# Altium PCB Receive_V1_Pcb.PcbDoc
Units mm, origin at the board's own origin, x right, y up, seen from the top; angles counter-clockwise.
Board outline 46.55 x 46.66 mm, 2 copper layers (Top Layer, Bottom Layer); 37 components, 26 nets, 103 pads, 22 vias.
Unrouted connection lines stored in the file: 1.
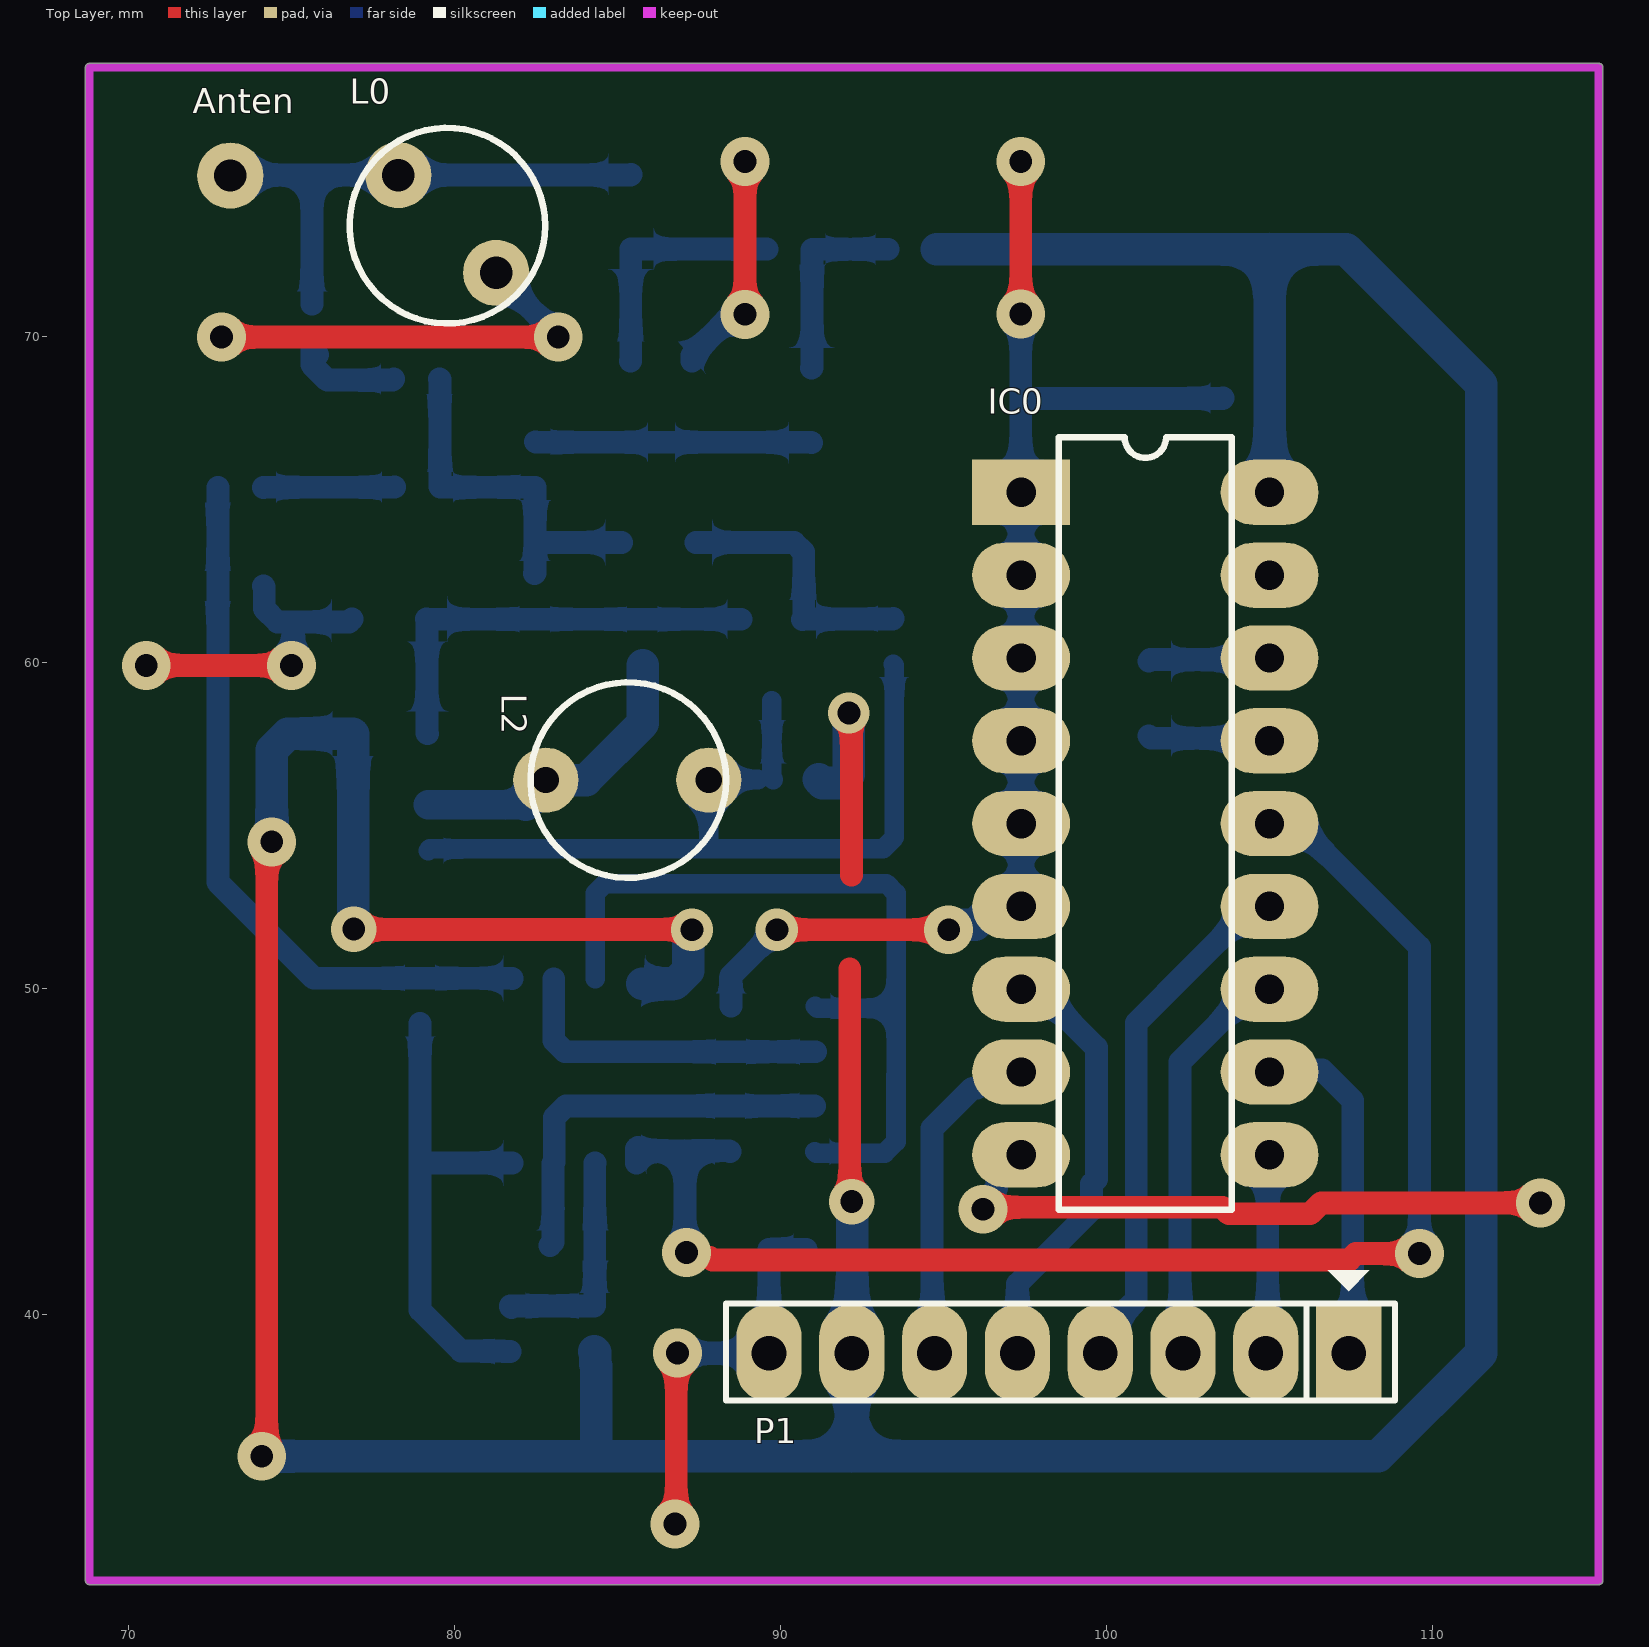
[diagram p0: Top Layer view]
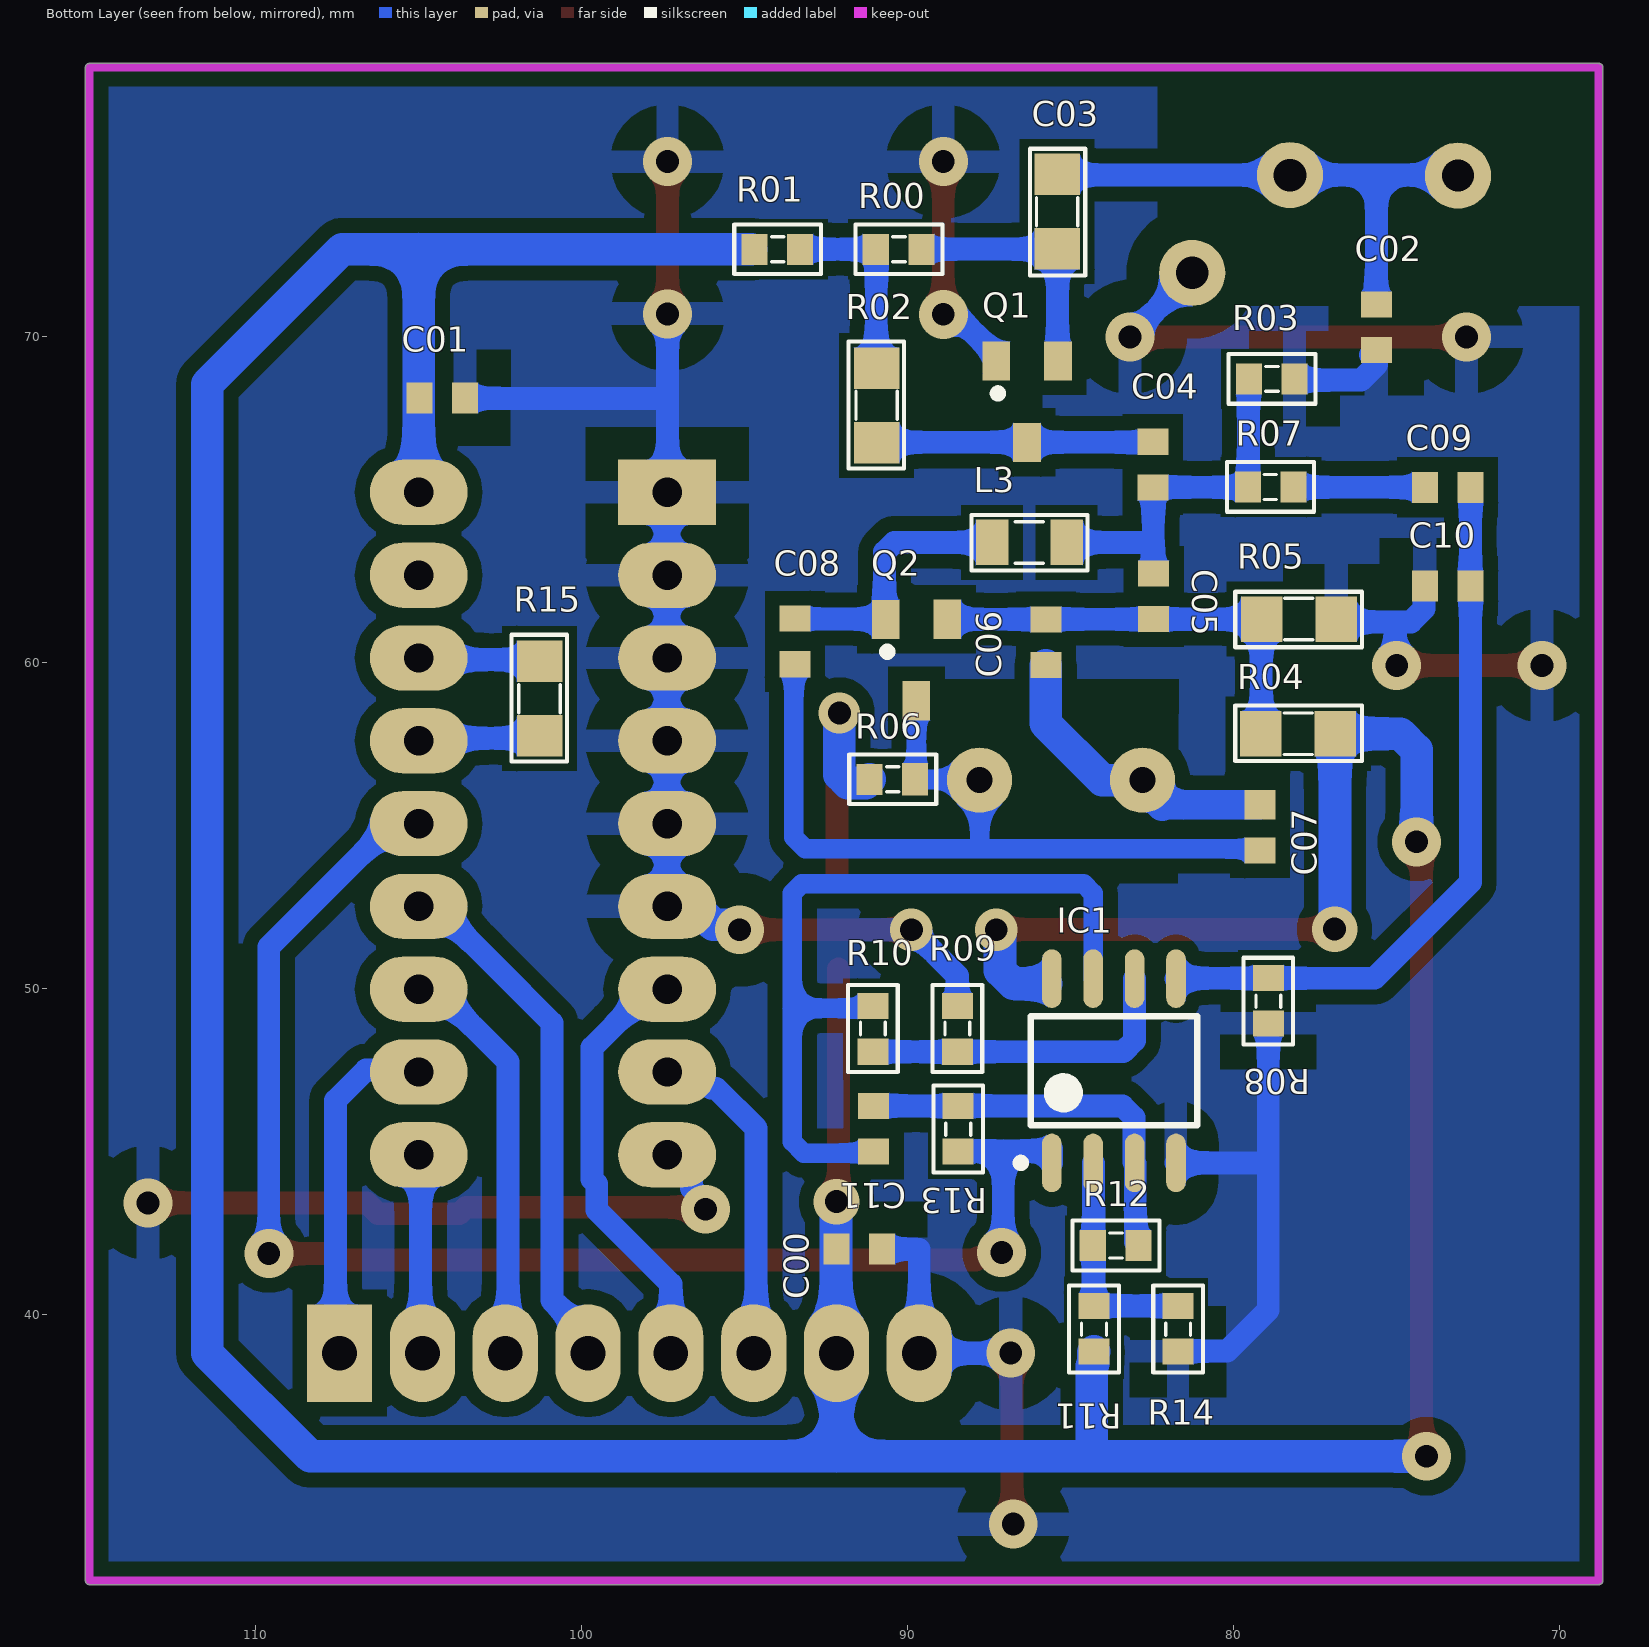
[diagram p1: Bottom Layer view, seen from below]
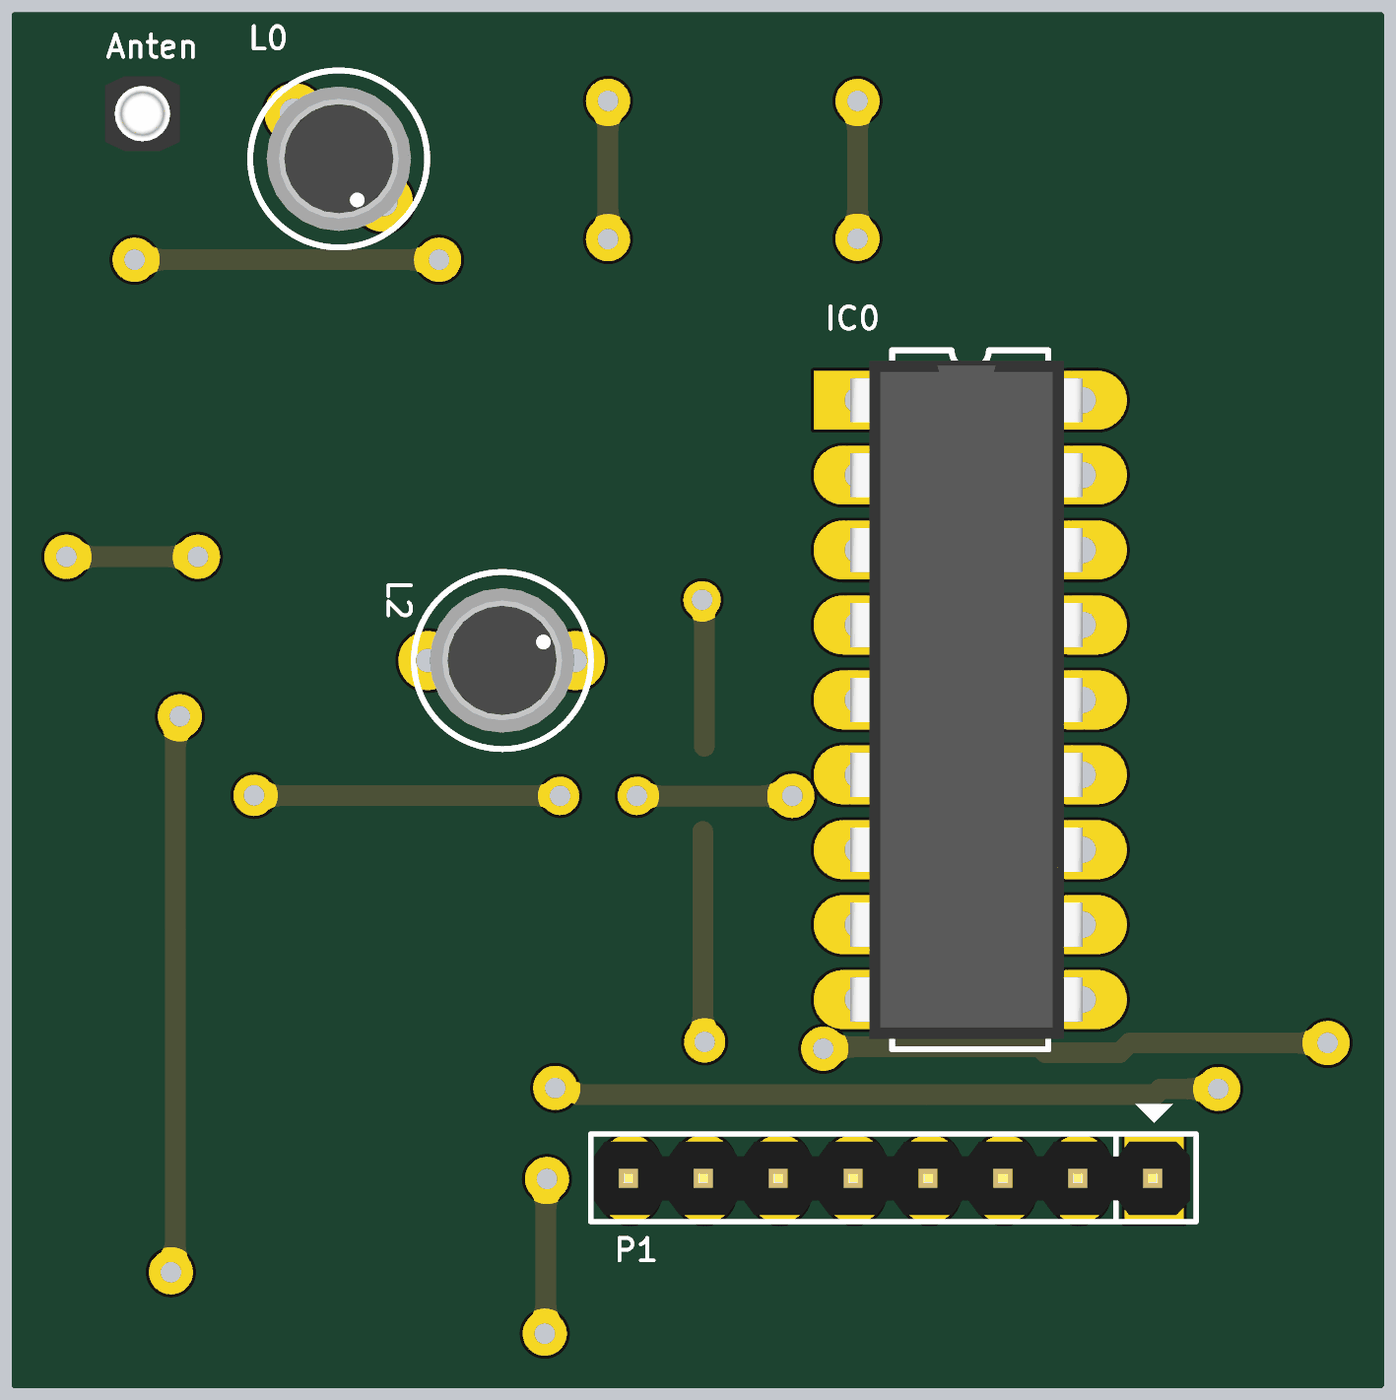
[diagram p2: 3D render of the assembled board from above, using the file's embedded part models]
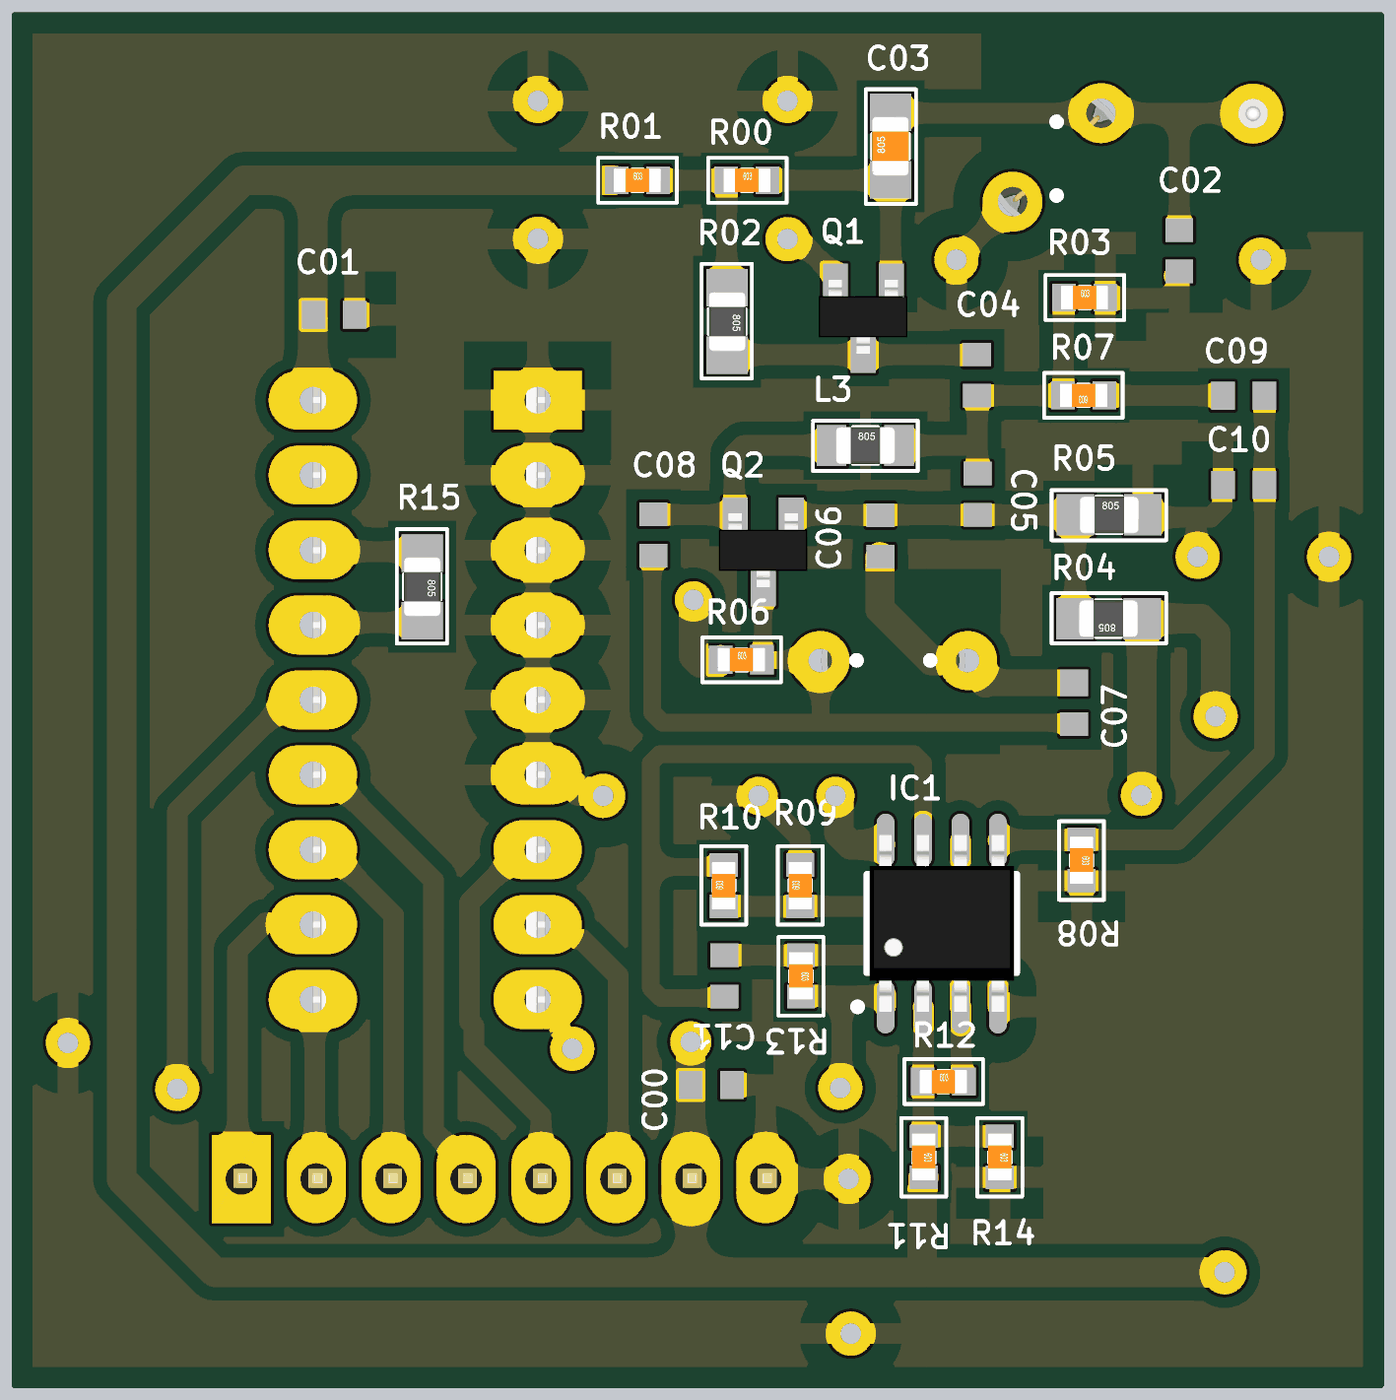
[diagram p3: 3D render of the assembled board from below, using the file's embedded part models]

## Layer stack, top to bottom
Top Solder: solder mask 0.0102, Solder Resist, Dk 3.5
Top Layer: signal copper 0.0356
Dielectric 1: dielectric 0.32, FR-4, Dk 4.8
Bottom Layer: signal copper 0.0356
Bottom Solder: solder mask 0.0102, Solder Resist, Dk 3.5

## Board outline
68.669,31.852 68.669,78.257 cw(c68.796,78.257) 68.796,78.385 112.573,78.385 115.087,78.385 cw(c115.087,78.257) 115.215,78.257 115.215,31.852 cw(c115.087,31.852) 115.087,31.724 68.796,31.724 cw(c68.796,31.852)

## Design rules (kind name [scope] priority, off if disabled: settings)
Clearance [All] p1: gap=0.457 ignorepadtopadclearanceinfootprint=FALSE
PolygonConnect [All] p1: connectstyle=Relief reliefconductorwidth=0.7 reliefentries=4 polygonreliefangle="90 Angle" airgapwidth=1
RoutingVias [All] p1: holewidth=0.711 width=1.27 viastyle="Through Hole" minholewidth=0.1 minwidth=0.1 maxholewidth=0.711 maxwidth=3
SolderMaskExpansion [All] p1: expansion=0.102 istentingtop=FALSE
Width [All] p1: maxlimit=5 minlimit=0.254 preferedwidth=0.7 minimp=50.000000 maximp=50.000000 favimp=50.000000
30 further rules are at their usual default settings.

## Components (designator, comment, footprint, x,y, rotation, side; value= is the part's Value field where it differs from the comment)
Anten "Test Point" TP 73.114,74.943 r90 top
C00 "Cap Non-Pol SMD" CAP-SM-0603#1 91.478,42.012 r0 bottom value=0.1uF
C01 "Cap Non-Pol SMD" CAP-SM-0603#1 104.267,68.123 r0 bottom value=0.1uF
C02 "Cap Non-Pol SMD" CAP-SM-0603#1 75.616,70.294 r90 bottom value=2p
C03 "Cap Non-Pol SMD" CAP-SM-0805 85.407,72.695 r90 bottom value=7p
C04 "Cap Non-Pol SMD" CAP-SM-0603#1 82.474,66.078 r90 bottom value=2p
C05 "Cap Non-Pol SMD" CAP-SM-0603#1 82.448,62.039 r90 bottom value=15p
C06 "Cap Non-Pol SMD" CAP-SM-0603#1 85.75,60.63 r90 bottom value=33pF
C07 "Cap Non-Pol SMD" CAP-SM-0603#2 79.184,54.94 r90 bottom value=4pF/X
C08 "Cap Non-Pol SMD" CAP-SM-0603#1 93.447,60.655 r90 bottom value=2p
C09 "Cap Non-Pol SMD" CAP-SM-0603#1 73.431,65.38 r0 bottom value=1uF
C10 "Cap Non-Pol SMD" CAP-SM-0603#1 73.431,62.357 r0 bottom value=1uF
C11 "Cap Non-Pol SMD" CAP-SM-0603#1 91.034,45.707 r270 bottom value=100nF
IC0 "PT2272" DIP18 101.181,55.067 r270 top
IC1 "LM358" "SOp 8" 83.668,47.485 r90 bottom
L0 "2.5T" L-DIP-M-5.3#1 79.769,73.406 r270 top value="150 mH"
L2 "4.5T" L-DIP-M-5.3#2 85.319,56.401 r0 top value="150 mH"
L3 "1uH" RES-SMD-0805 86.258,63.691 r180 bottom value="150 mH"
P1 "Header 8" JP8 107.417,38.824 r180 top
Q1 "C1815" SOT23B 86.335,68.008 r0 bottom
Q2 "C1815" SOT23B 89.725,60.084 r0 bottom
R00 "RESISTOR SMD" RES-SM-0603#1 90.959,72.682 r180 bottom value=47K/39K
R01 "RESISTOR SMD" RES-SM-0603#1 94.678,72.682 r180 bottom value=180K/680R
R02 "RESISTOR SMD" RES-SM-0805 90.945,69.037 r270 bottom value=5.1K/680R
R03 "RESISTOR SMD" RES-SM-0603#1 79.515,68.707 r180 bottom value=47K/6.2K
R04 "RESISTOR SMD" RES-SM-0805 76.873,57.823 r0 bottom value=6.2K/150K
R05 "RESISTOR SMD" RES-SM-0805 79.134,61.341 r180 bottom value=3.9K/56K
R06 "RESISTOR SMD" RES-SM-0603#2 91.149,56.426 r180 bottom value=56K/27K
R07 "RESISTOR SMD" RES-SM-0603#1 78.168,65.392 r0 bottom value=27K/6.2K
R08 "RESISTOR SMD" RES-SM-0603#1 78.93,50.319 r270 bottom value=10K/150K
R09 "RESISTOR SMD" RES-SM-0603#1 88.468,48.082 r90 bottom value=10K/680R
R10 "RESISTOR SMD" RES-SM-0603#1 91.059,48.082 r90 bottom value=2.2M/150K
R11 "RESISTOR SMD" RES-SM-0603#1 84.277,40.259 r270 bottom value=22/K10K
R12 "RESISTOR SMD" RES-SM-0603#1 84.303,42.126 r180 bottom value=18K/150K
R13 "RESISTOR SMD" RES-SM-0603#1 88.443,46.395 r270 bottom value=2.2M/3.3M
R14 "RESISTOR SMD" RES-SM-0603#1 81.699,40.259 r270 bottom
R15 "RESISTOR SMD" RES-SM-0805 101.282,60.046 r270 bottom value=680K

## Footprints (in the part's own frame and the unit in brackets; to place one, negate y for a bottom-side part, rotate by r counter-clockwise, add the part's x,y. Pads: shape width x height; smd on the part's side, far side on the other; paste and mask are expansions set on the pad)
CAP-SM-0603#1 [mm] "SMD Ceramic Capacitor Size 0603"
  rect 0.8x0.95 smd: 1(-0.7,0) 2(0.7,0)
  body extent -0.85,-0.45 0.85,0.45, height 0.6
CAP-SM-0603#2 [mm] "SMD Ceramic Capacitor Size 0603"
  rect 0.8x0.95 smd: 1(-0.7,0)
  rect 0.9x0.95 smd: 2(0.7,0)
  body extent -0.85,-0.45 0.85,0.45, height 0.6
CAP-SM-0805 [mil]
  rect 50x55 smd: 1(0,0) 2(90,0)
  silkscreen extent -32,-34 121,33, body extent 6,-25 84,25, height 31
DIP18 [mm] "DIP; 18 Leads; Row Spacing 7.62 mm; Pitch 2.54 mm"
  rect 2x3 hole 0.9: 1(-10.16,-3.81)
  oval 2x3 hole 0.9: 2(-7.62,-3.81) 3(-5.08,-3.81) 4(-2.54,-3.81) 5(0,-3.81) 6(2.54,-3.81) 7(5.08,-3.81) 8(7.62,-3.81) 9(10.16,-3.81) 10(10.16,3.81) 11(7.62,3.81) 12(5.08,3.81) 13(2.54,3.81) 14(0,3.81) 15(-2.54,3.81) 16(-5.08,3.81) 17(-7.62,3.81) 18(-10.16,3.81)
  silkscreen extent -11.85,-2.65 11.85,2.65, body extent -11.49,-4.06 11.5,3.81, height 5.08
JP8 [mm] "JP8"
  rect 2x3 hole 1.067: 1(0,0)
  oval 2x3 hole 1.067: 2(2.54,0) 3(5.08,0) 4(7.62,0) 5(10.16,0) 6(12.7,0) 7(15.24,0) 8(17.78,0)
  silkscreen extent -1.42,-2.54 19.1,1.45, body extent -1.22,-1.27 19,1.23, height 8.22
L-DIP-M-5.3#1 [mil] "THT Inductor, 2-Leads, Body 5.3  mm"
  round 80 hole 39.37: 1(-61.11,-59.12) 2(57,59)
  silkscreen extent -118,-118 118,118, body extent -96,-96 96,96, height 299
L-DIP-M-5.3#2 [mil] "THT Inductor, 2-Leads, Body 5.3  mm"
  round 78.74 hole 31.5: 1(-99.57,0) 2(97.28,0)
  silkscreen extent -118,-118 118,118, body extent -96,-96 96,96, height 299
RES-SM-0603#1 [mm]
  rect 0.8x0.95 smd: 1(-0.014,0) 2(1.386,0)
  silkscreen extent -0.64,-0.76 2.03,0.76, body extent -0.11,-0.4 1.49,0.4, height 0.3
RES-SM-0603#2 [mm]
  rect 0.8x0.95 smd: 1(-0.014,0)
  rect 0.8x1 smd: 2(1.386,0)
  silkscreen extent -0.64,-0.76 2.03,0.76, body extent -0.11,-0.4 1.49,0.4, height 0.3
RES-SM-0805 [mil]
  rect 50x55 smd: 1(0,0) 2(90,0)
  silkscreen extent -32,-34 121,33, body extent 6,-25 84,25, height 31
RES-SMD-0805 [mil]
  rect 39.37x55 smd: 1(-45,0) 2(45,0)
  silkscreen extent -70,-34 70,33, body extent -39,-25 39,25, height 31
"SOp 8" [mm] "SOIC, 8-Leads, Body 4.9x3.9mm, Pitch 1.27mm, IPC High Density"
  oval 1.8x0.6 smd: 1(-2.825,1.905) 2(-2.825,0.635) 3(-2.825,-0.635) 4(-2.825,-1.905) 5(2.825,-1.905) 6(2.825,-0.635) 7(2.825,0.635) 8(2.825,1.905)
  silkscreen extent -2.95,-2.55 1.68,2.98, body extent -2.99,-2.45 3,2.45, height 1.6
SOT23B [mm] "SOT 23B"
  rect 0.85x1.2 smd: 1(0.94,-1.245) 2(0,1.25) 3(-0.95,-1.25)
  silkscreen extent 0.77,-0.38 1.02,-0.13, body extent -1.5,-1.3 1.5,1.2, height 1.06
TP [mil] "Connect 1"
  round 80 hole 39: TP1(0,0)
  body extent -50,-50 50,50, height 179

## Part data
C00 C01 C02 C03 C04 C05 C06 C07 C08 C09 C10 C11: "Capacitor"
IC0: "Remote Control Decoder"
IC1: "Low-Power Dual Operational Amplifier"
L0 L2 L3: library part L-DIP-1, "Inductor"
P1: "Header, 8-Pin", LatestRevisionDate=17-Jul-2002, LatestRevisionNote="Re-released for DXP Platform.", Publisher="Altium Limited"
Q1 Q2: "NPN Bipolar Transistor"
R00 R01 R02 R03 R04 R05 R06 R07 R08 R09 R10 R11 R12 R13 R14 R15: "Resistor"
  R14: R?=22K/10K

## Via types
v1: diameter 1.5, hole 0.7, Top Layer to Bottom Layer, 17 vias
v2: diameter 1.3, hole 0.7, Top Layer to Bottom Layer, 2 vias
v3: diameter 1.4, hole 0.7, Top Layer to Bottom Layer, 2 vias
v4: diameter 1.27, hole 0.7, Top Layer to Bottom Layer, 1 vias

## Nets (pads, with @x,y where several pads share a name; then routed paths per layer and width w, separated by ;. In a path a pad name is that pad's centre, name@x,y a point inside that pad or via, vN(x,y) a via of type N, cw(c..) or ccw(c..) an arc to the next point about the centre after c; other vN are vias at no path point)
D0: IC0.13 P1.4 | length 16.2
  Bottom Layer w0.7: P1.4 99.797,39.34 100.901,40.445 100.901,48.954 102.684,50.736 104.475,52.527 IC0.13
D1: IC0.12 P1.3 | length 12.6
  Bottom Layer w0.7: P1.3 102.248,38.913 102.248,47.76 104.475,49.987 IC0.12
D2: IC0.11 P1.1 | length 10.8
  Bottom Layer w0.7: IC0.11 105.05,47.507 106.608,47.507 107.544,46.571 107.544,38.951 P1.1
D3: IC0.10 P1.2 | length 6.1
  Bottom Layer w0.7: P1.2 104.934,38.881 104.934,44.85 IC0.10
D4: IC0.8 P1.6 | length 10.4
  Bottom Layer w0.7: P1.6 94.64,38.9 94.64,45.72 95.87,46.949 96.021,46.949 96.519,47.447 IC0.8
D5: IC0.7 P1.5 | length 13.4
  Bottom Layer w0.7: P1.5 97.257,40.945 99.53,43.218 99.53,44.01 99.678,44.159 99.678,48.196 97.887,49.987 IC0.7
Data: IC0.14 IC1.1 R13.2 | length 44.7
  Top Layer w0.7: v1(87.109,41.91) 87.262,41.757 87.828,41.757 87.904,41.681 107.438,41.681 107.634,41.877 v1(109.588,41.877)
  Bottom Layer w0.7: IC1.1 IC1.1@85.573,45.034 ; IC1.1@85.615,45.136 85.573,45.093 IC1.1@85.573,45.034 ; v1(87.109,41.91) 87.058,41.961 87.058,45.034 ; R13.2 88.417,45.034 87.058,45.034 ; IC0.14 105.804,55.067 109.588,51.283 v1(109.588,41.877) ; IC1.1@85.573,45.034 87.058,45.034
GND: C00.1 C01.1 C02.1 C10.2 IC0.1 IC0.2 IC0.3 IC0.4 IC0.5 IC0.6 IC0.9 IC1.4 L0.2 P1.8 Q1.1 R03.2 R05.2 R08.2 R09.2 R14.2 | length 119.8
  Top Layer w0.7: v1(70.536,59.919) v1(74.993,59.919) v1@74.777,59.919 ; v1(72.847,69.99) v1(83.172,69.99) ; v1(86.754,33.579) 86.792,33.617 86.792,38.786 v1(86.83,38.824) ; v1(88.9,70.688) v1(88.9,75.374) ; v2(89.878,51.812) v1(95.148,51.812) ; v1(96.198,43.239) 96.258,43.299 103.543,43.299 103.742,43.1 106.239,43.1 106.573,43.434 v1(113.297,43.434) ; v1(97.358,70.701) v1(97.358,75.374)
  Bottom Layer w0.7: C10.2 74.155,62.333 74.155,61.655 74.558,61.252 75.044,61.252 ; v1(74.993,59.919) 75.044,59.969 75.044,61.252 ; C02.1@75.794,69.448 75.648,69.594 C02.1 75.616,69.144 76.091,68.669 78.091,68.669 R03.2 ; R05.2 76.759,61.252 75.044,61.252 ; R08.2 78.93,44.539 ; L0.2 81.267,71.926 83.172,70.021 v1(83.172,69.99) ; R14.2 81.492,38.873 81.478,38.887 80.188,38.887 78.93,40.145 78.93,44.539 ; IC1.4 79.052,44.66 78.93,44.539 ; v1(86.83,38.824) P1.8 89.637,42.012 C00.1 ; Q1.1 87.274,69.428 88.389,70.542 88.754,70.542 v1(88.9,70.688) ; R09.2 88.468,50.402 v2(89.878,51.812) ; v1(95.148,51.812) v1@95.301,51.965 ; v1(96.198,43.239) 96.198,43.455 96.622,43.88 96.622,44.307 97.223,44.907 IC0.9 ; IC0.6@96.519,52.527 IC0.6 IC0.5 IC0.4 IC0.3 IC0.2 IC0.1 97.358,65.24 v1(97.358,70.701) ; 97.447,68.11 103.554,68.11 C01.1
  Bottom Layer w1: v1@95.301,51.965 95.957,51.965 IC0.6@96.519,52.527
NetAnten_TP1: Anten.TP1 C02.2 C03.2 L0.1 | length 16.3
  Bottom Layer w0.7: Anten.TP1 73.133,74.962 75.616,74.962 ; C02.2 75.616,74.962 ; C03.2 85.388,74.962 75.616,74.962
NetC03_1: C03.1 Q1.3 R00.2 | length 7.6
  Bottom Layer w0.7: Q1.3 85.396,69.27 85.396,72.683 C03.1 85.414,72.688 89.567,72.688 R00.2
NetC04_2: C04.2 Q1.2 R02.2 | length 8.5
  Bottom Layer w0.7: C04.2 82.487,66.765 90.931,66.765 R02.2
NetC05_1: C05.1 C06.2 Q2.3 R04.2 R05.1 | length 13.2
  Bottom Layer w0.7: R05.1 R05.1@79.137,61.337 ; R04.2 79.146,57.836 79.146,61.328 R05.1@79.137,61.337 ; Q2.3 88.772,61.337 R05.1@79.137,61.337
NetC06_1: C06.1 C07.2 L2.1 | length 9.5
  Bottom Layer w0.7: L2.1@82.789,56.249 L2.1 ; C06.1 C06.1@85.763,59.917
  Bottom Layer w0.9: C07.2 L2.1@82.18,55.64
  Bottom Layer w1: L2.1@82.18,55.64 L2.1@82.789,56.249 ; L2.1 84.023,56.401 85.763,58.141 C06.1@85.763,59.917
NetC07_1: C07.1 C08.1 L2.2 Q2.2 R06.2 | length 25.5
  Bottom Layer w0.6: C07.1 79.237,54.292 93.133,54.292 93.485,54.644 93.485,59.917 C08.1 ; 87.782,54.597 87.782,56.394 L2.2 87.809,56.42 89.3,56.42 ; Q2.2 89.725,56.458 R06.2@89.764,56.42
NetC08_2: C08.2 L3.1 Q2.1 | length 8.3
  Bottom Layer w0.7: L3.1 90.406,63.691 90.703,63.393 90.703,61.366 Q2.1 ; Q2.1@90.679,61.342 93.433,61.342 C08.2
NetC09_1: C09.1 C10.1 IC1.5 R08.1 | length 22.4
  Bottom Layer w0.7: C09.1 C10.1 72.731,53.265 75.675,50.322 78.93,50.322 81.751,50.322 IC1.5
NetC09_2: C09.2 R07.1 | length 4
  Bottom Layer w0.7: C09.2 74.138,65.386 78.148,65.386 R07.1
NetC11_1: C11.1 IC1.3 R12.2 R13.1 | length 12.1
  Bottom Layer w0.7: R12.2 83.015,42.224 83.015,44.643 IC1.3 83.05,44.678 83.05,46.051 83.406,46.407 C11.1
NetC11_2: C11.2 IC1.7 R10.2 | length 24.9
  Bottom Layer w0.6: IC1.7 84.303,52.927 84.6,53.224 93.238,53.224 93.535,52.927 93.535,49.403 ; C11.2 91.083,44.958 93.182,44.958 93.533,45.309 93.533,47.355 93.535,47.357 93.535,49.403 ; R10.2 91.124,49.403 93.535,49.403
NetIC0_15: IC0.15 R15.2 | length 3.8
  Bottom Layer w0.7: R15.2 101.359,57.683 104.915,57.683 IC0.15
NetIC0_16: IC0.16 R15.1 | length 3.8
  Bottom Layer w0.7: R15.1 101.333,60.096 104.94,60.096 IC0.16
NetIC1_2: IC1.2 R11.1 R12.1 R14.1 | length 7
  Bottom Layer w0.7: R14.1 81.699,40.259 81.737,40.221 81.79,40.273 R11.1 84.29,40.286 84.29,44.648 IC1.2
NetIC1_6: IC1.6 R09.1 R10.1 | length 10.1
  Bottom Layer w0.7: IC1.6 83.033,48.416 83.381,48.068 R09.1 R10.1
NetR00_1: R00.1 R01.2 R02.1 | length 6
  Bottom Layer w0.7: R02.1 90.959,69.051 90.959,72.668 R00.1 R01.2
Stage1: C04.1 C05.2 L3.2 R03.1 R07.2 | length 11.6
  Bottom Layer w0.7: R03.1 79.542,68.694 79.542,65.405 R07.2 79.561,65.385 82.467,65.385 82.461,65.38 82.461,63.767 ; C05.2 82.461,62.752 82.461,63.767 ; L3.2 82.537,63.691 82.461,63.767
VCC: C00.2 C01.2 IC0.18 IC1.8 P1.7 R01.1 R04.1 R06.1 R11.2 | length 164.1
  Top Layer w0.7: v1(74.079,35.662) 74.231,35.814 74.231,54.356 v1(74.384,54.508) ; v3(76.898,51.83) 76.907,51.821 87.266,51.821 v2(87.274,51.812) ; v4(92.088,58.458) 92.164,58.382 92.164,53.492 ; 92.113,50.604 92.113,43.536 v3(92.177,43.472)
  Bottom Layer w0.7: v2@87.16,51.705 87.271,51.816 v2(87.274,51.812)
  Bottom Layer w1: v1(74.079,35.662) 92.177,35.662 ; v1(74.384,54.508) 74.384,57.328 74.879,57.823 R04.1 76.886,57.81 76.886,51.842 v3(76.898,51.83) ; R11.2 84.303,38.848 84.303,38.481 84.341,38.443 84.341,35.941 ; IC1.8@85.75,50.152 86.75,50.152 87.16,50.562 v2@87.16,51.705 ; R06.1 91.278,56.312 91.828,56.312 92.088,56.571 v4(92.088,58.458) ; v3(92.177,43.472) 92.227,43.472 92.342,43.358 92.19,43.206 C00.2@92.19,41.998 ; C00.2@92.19,41.998 92.19,38.837 P1.7 92.177,35.662 ; R01.1@94.79,72.682 104.991,72.682 ; IC0.18 104.991,72.682 ; 92.177,35.662 108.318,35.662 111.481,38.824 111.481,68.542 107.34,72.682 104.991,72.682
pads on no net: IC0.17

## Polygon pours and split planes (outlines as drawn)
GND on Bottom Layer "GND_L02_P001" (solid, pour order 1): 69.368,32.173 69.38,78.219 115.087,78.219 114.979,32.294

## Keep-outs
Keep-Out Layer:
  lines w0.254: 68.796,31.852 68.796,78.257 112.573,78.257 115.087,78.257 115.087,31.852 68.796,31.852

## Other copper
Bottom Layer:
  pour cut-out: 69.01,78.041 82.334,78.041 82.334,71.088 82.175,70.929 68.957,70.93
  pour cut-out: 81.661,59.512 88.875,59.512 88.875,53.269 88.919,53.224 81.7,53.224